# EAGLE board defcon2023_v1 (EAGLE 9.6.2)
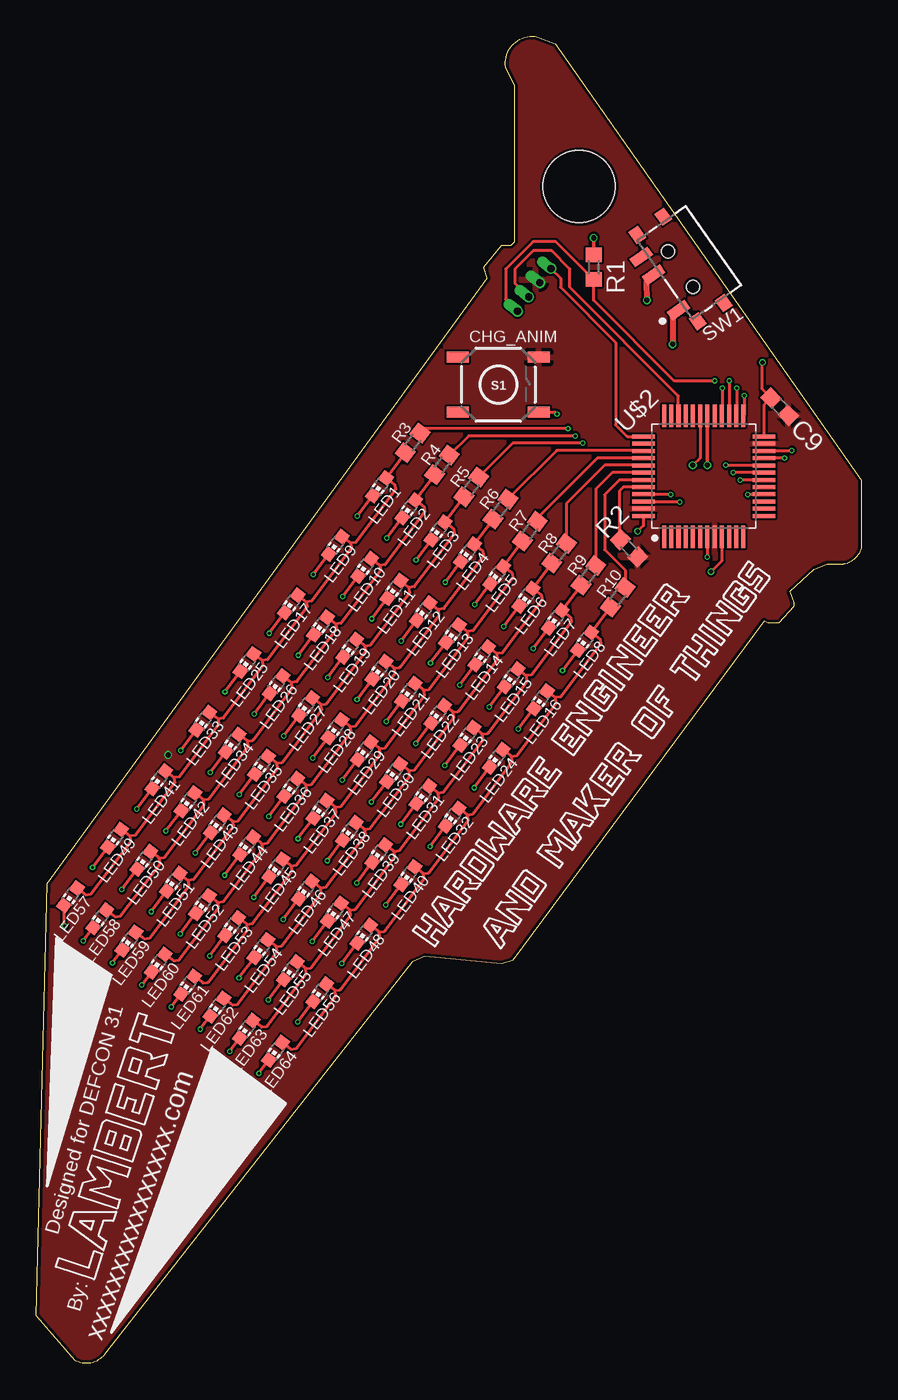
[diagram p0: board, top side]
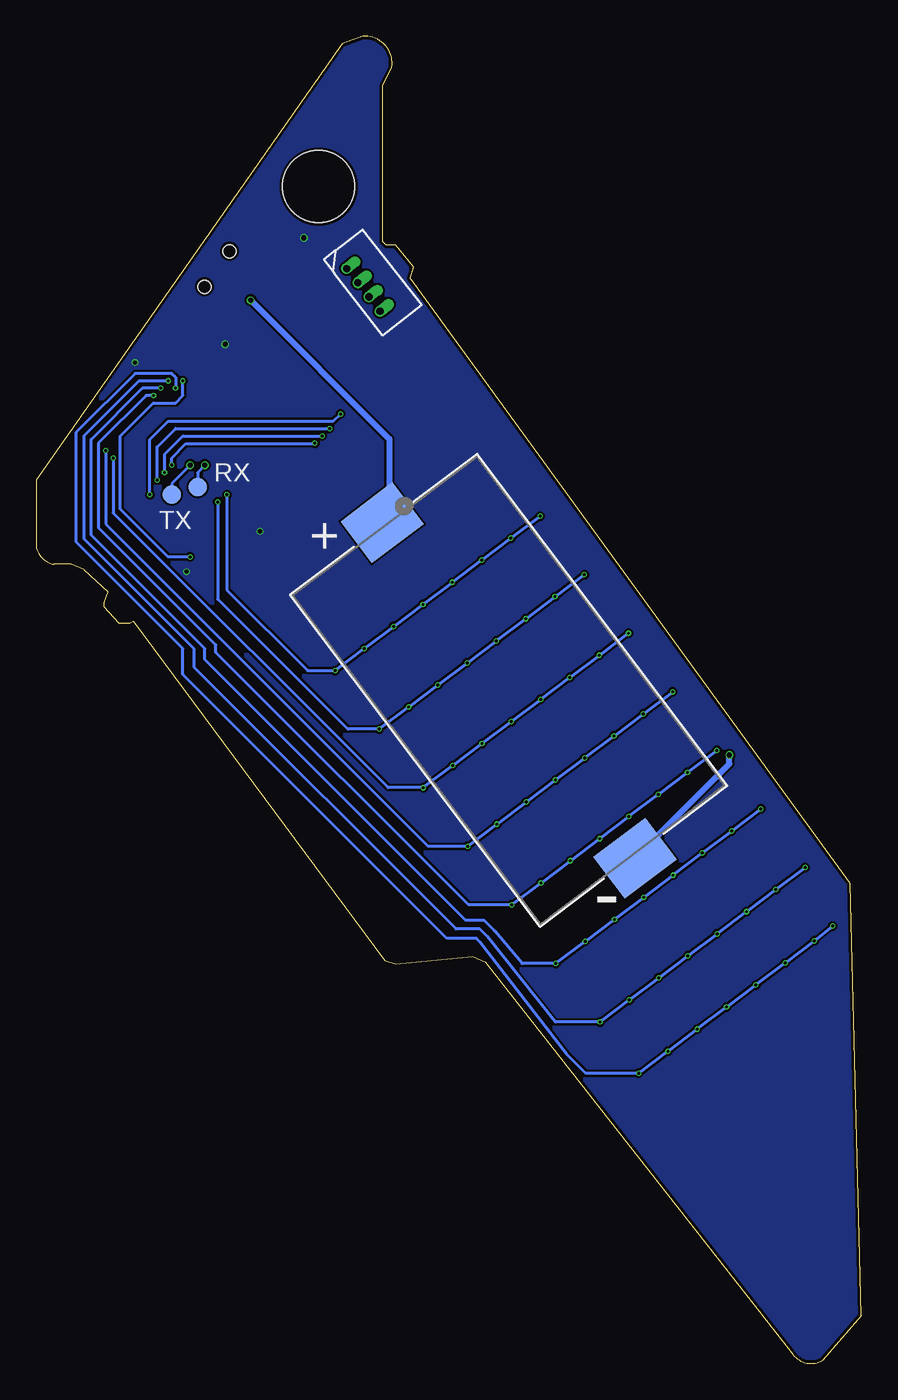
[diagram p1: board, bottom side, seen from below]

Size 57.15 x 91.94 mm. Coordinates in mm from the lower left corner, seen from the top.
Outline: 0,3.28 0.76,33.25 31.24,75.16 30.99,75.93 32.26,77.45 32.89,77.45 33.15,77.7 33.15,88.5 32.51,89.77 arc-104 34.54,91.93 35.94,91.42 57.15,61.19 57.15,56.62 arc-75 55.88,55.35 54.74,55.35 53.85,54.97 52.2,53.45 52.45,52.69 52.45,52.43 51.44,51.29 50.67,51.29 50.42,51.42 33.02,27.92 32.26,27.67 26.92,28.17 26.03,27.79 4.83,0.74 arc-90 2.67,0.23 0,3.28
Copper layers (1*16): Top 0.035mm / dielectric 0.2mm / Bottom 0.035mm
Design rules "JLC_2Layer_(workInProgress)": minimum track width 3.5mil, minimum drill 0.2mm, track to track 3.5mil, track to pad 5mil, pad to pad 5mil, via to via 5mil, smd to smd 0mil, copper to edge 0.2mm, drill to drill 0.2mm, minimum pad ring 3mil, minimum via ring 3mil, stop-mask expansion 0mil, vias tented up to drill 100mil, thermal gap 10mil
Holes 5 mm at 37.59,81.51

## Footprints (pad centres in the part's own frame; a part is rotated, then mirrored left to right if it is on the bottom)
BH-49A-5_ADM = smd 3.607 x 4.496: 1 -14.55,0; 2 14.55,0
C0603 = smd 1.1 x 1: 1 -0.85,0; 2 0.85,0
CHIP-LED0603 = smd 0.8 x 0.8: A 0,-0.75; C 0,0.75
4-PIN-1.25MM = drill 0.5 offset: P$1 -1.875,0.82; P$2 -0.625,0.82; P$3 0.625,0.82; P$4 1.875,0.82
R0603 = smd 1 x 1.1: 1 -0.85,0; 2 0.85,0
B1,27 = smd 1.27 x 1.27: TP 0,0
TACTILE_SWITCH_SMD_5.2MM = smd 1.524 x 0.762: 1 -2.794,1.905; 2 2.794,1.905; 3 -2.794,-1.905; 4 2.794,-1.905
ALPS_SSSS811101_0 = smd 0.7 x 1.5: 1 -2.25,2.5; 2 0.75,2.5; 3 2.25,2.5 | smd 1 x 0.8: 4 -3.65,1.85; 4-2 3.65,1.85; 4-3 -3.65,-0.35; 4-4 3.65,-0.35 | hole 0.9: -1.5,0.75; 1.5,0.75
QFP50P900X900X160-48 = smd 1.559 x 0.28: 1 -4.178,2.75; 2 -4.178,2.25; 3 -4.178,1.75; 4 -4.178,1.25; 5 -4.178,0.75; 6 -4.178,0.25; 7 -4.178,-0.25; 8 -4.178,-0.75; 9 -4.178,-1.25; 10 -4.178,-1.75; 11 -4.178,-2.25; 12 -4.178,-2.75; 25 4.178,-2.75; 26 4.178,-2.25; 27 4.178,-1.75; 28 4.178,-1.25; 29 4.178,-0.75; 30 4.178,-0.25; 31 4.178,0.25; 32 4.178,0.75; 33 4.178,1.25; 34 4.178,1.75; 35 4.178,2.25; 36 4.178,2.75 | smd 0.28 x 1.559: 13 -2.75,-4.178; 14 -2.25,-4.178; 15 -1.75,-4.178; 16 -1.25,-4.178; 17 -0.75,-4.178; 18 -0.25,-4.178; 19 0.25,-4.178; 20 0.75,-4.178; 21 1.25,-4.178; 22 1.75,-4.178; 23 2.25,-4.178; 24 2.75,-4.178; 37 2.75,4.178; 38 2.25,4.178; 39 1.75,4.178; 40 1.25,4.178; 41 0.75,4.178; 42 0.25,4.178; 43 -0.25,4.178; 44 -0.75,4.178; 45 -1.25,4.178; 46 -1.75,4.178; 47 -2.25,4.178; 48 -2.75,4.178

## Placement (x,y rotation side)
B1  BH-49A-5BH-49A-5_ADM  [BH-49A-5_ADM]  24.43,46.62 307 bottom
C9  0.1uF  [C0603]  51.49,66.27 315 top
LED1  [CHIP-LED0603]  23.78,60.72 143 top
LED2  [CHIP-LED0603]  25.81,59.19 143 top
LED3  [CHIP-LED0603]  27.83,57.66 143 top
LED4  [CHIP-LED0603]  29.86,56.13 143 top
LED5  [CHIP-LED0603]  31.89,54.6 143 top
LED6  [CHIP-LED0603]  33.92,53.07 143 top
LED7  [CHIP-LED0603]  35.95,51.55 143 top
LED8  [CHIP-LED0603]  37.98,50.02 143 top
LED9  [CHIP-LED0603]  20.72,56.66 143 top
LED10  [CHIP-LED0603]  22.75,55.13 143 top
LED11  [CHIP-LED0603]  24.78,53.6 143 top
LED12  [CHIP-LED0603]  26.81,52.08 143 top
LED13  [CHIP-LED0603]  28.83,50.55 143 top
LED14  [CHIP-LED0603]  30.86,49.02 143 top
LED15  [CHIP-LED0603]  32.89,47.49 143 top
LED16  [CHIP-LED0603]  34.92,45.96 143 top
LED17  [CHIP-LED0603]  17.66,52.6 143 top
LED18  [CHIP-LED0603]  19.69,51.08 143 top
LED19  [CHIP-LED0603]  21.72,49.55 143 top
LED20  [CHIP-LED0603]  23.75,48.02 143 top
LED21  [CHIP-LED0603]  25.78,46.49 143 top
LED22  [CHIP-LED0603]  27.81,44.96 143 top
LED23  [CHIP-LED0603]  29.83,43.43 143 top
LED24  [CHIP-LED0603]  31.86,41.9 143 top
LED25  [CHIP-LED0603]  14.61,48.55 143 top
LED26  [CHIP-LED0603]  16.63,47.02 143 top
LED27  [CHIP-LED0603]  18.66,45.49 143 top
LED28  [CHIP-LED0603]  20.69,43.96 143 top
LED29  [CHIP-LED0603]  22.72,42.43 143 top
LED30  [CHIP-LED0603]  24.75,40.9 143 top
LED31  [CHIP-LED0603]  26.78,39.38 143 top
LED32  [CHIP-LED0603]  28.8,37.85 143 top
LED33  [CHIP-LED0603]  11.55,44.49 143 top
LED34  [CHIP-LED0603]  13.58,42.96 143 top
LED35  [CHIP-LED0603]  15.61,41.43 143 top
LED36  [CHIP-LED0603]  17.63,39.9 143 top
LED37  [CHIP-LED0603]  19.66,38.38 143 top
LED38  [CHIP-LED0603]  21.69,36.85 143 top
LED39  [CHIP-LED0603]  23.72,35.32 143 top
LED40  [CHIP-LED0603]  25.75,33.79 143 top
LED41  [CHIP-LED0603]  8.49,40.43 143 top
LED42  [CHIP-LED0603]  10.52,38.9 143 top
LED43  [CHIP-LED0603]  12.55,37.38 143 top
LED44  [CHIP-LED0603]  14.58,35.85 143 top
LED45  [CHIP-LED0603]  16.6,34.32 143 top
LED46  [CHIP-LED0603]  18.63,32.79 143 top
LED47  [CHIP-LED0603]  20.66,31.26 143 top
LED48  [CHIP-LED0603]  22.69,29.73 143 top
LED49  [CHIP-LED0603]  5.43,36.38 143 top
LED50  [CHIP-LED0603]  7.46,34.85 143 top
LED51  [CHIP-LED0603]  9.49,33.32 143 top
LED52  [CHIP-LED0603]  11.52,31.79 143 top
LED53  [CHIP-LED0603]  13.55,30.26 143 top
LED54  [CHIP-LED0603]  15.58,28.73 143 top
LED55  [CHIP-LED0603]  17.6,27.2 143 top
LED56  [CHIP-LED0603]  19.63,25.68 143 top
LED57  [CHIP-LED0603]  2.38,32.32 143 top
LED58  [CHIP-LED0603]  4.4,30.79 143 top
LED59  [CHIP-LED0603]  6.43,29.26 143 top
LED60  [CHIP-LED0603]  8.46,27.73 143 top
LED61  [CHIP-LED0603]  10.49,26.2 143 top
LED62  [CHIP-LED0603]  12.52,24.68 143 top
LED63  [CHIP-LED0603]  14.55,23.15 143 top
LED64  [CHIP-LED0603]  16.58,21.62 143 top
PROG  4-PIN-1.25MM  [4-PIN-1.25MM]  33.84,74.86 128 bottom
R1  10k  [R0603]  38.61,75.93 90 top
R2  10k  [R0603]  41.06,56.46 315 top
R3  110r  [R0603]  26.07,63.76 53 top
R4  110r  [R0603]  28.1,62.23 53 top
R5  110r  [R0603]  30.13,60.7 53 top
R6  110r  [R0603]  32.16,59.17 53 top
R7  110r  [R0603]  34.18,57.65 53 top
R8  110r  [R0603]  36.21,56.12 53 top
R9  110r  [R0603]  38.24,54.59 53 top
R10  110r  [R0603]  40.27,53.06 53 top
RX  PTR1B1,27  [B1,27]  45.97,60.69 0 bottom
S1  [TACTILE_SWITCH_SMD_5.2MM]  32,67.8 0 top
SW1  ALPS_SSSS811101ALPS_SSSS811101_0_0  [ALPS_SSSS811101_0]  45.24,76.24 125 top
TX  PTR1B1,27  [B1,27]  47.75,60.18 0 bottom
U$2  STM32L431CC  [QFP50P900X900X160-48]  46.23,61.45 90 top

## Library data of the parts
B1 = 2057-BH-49A-5-ND; COPYRIGHT: Copyright (C) 2023 Ultra Librarian. All rights reserved.; DIGI-KEY_PART_NUMBER_1: 2057-BH-49A-5-ND; MANUFACTURER_PART_NUMBER: BH-49A-5; MFR_NAME: ADAM TECHNOLOGIES INC
C9 = rcl; SPICEPREFIX: C
LED1-LED64 = adafruit
PROG = Wingling Library
R1-R10 = rcl; SPICEPREFIX: R
RX TX = testpad
S1 = SparkFun-Switches; PROD_ID: SWCH-08247; SF_SKU: COM-08720
SW1 = ALPS - SSSS811101; CENTROID_NOT_SPECIFIED: No; CONTACT_RESISTANCE: 70mΩ; DATASHEET: http://www.alps.com/prod/info/E/HTML/Switch/Slide/SSSS8/SSSS811101.html; LEAD_FREE: yes; MF: ALPS; MOUSER_PART_NUMBER: 688-SSSS811101; MPN: SSSS811101; PACKAGE: SMD_SW_SPDT; PREFIX: SW; RATING_(MAX.)/(MIN.)_(RESISTIVE_LOAD): 0.3A 5V DC/50µA 3V DC; ROHS: yes; TEMPERATURE_RANGE_HIGH: +85°C; TEMPERATURE_RANGE_LOW: -40°C
U$2 = prankbox

## Nets
+3V3: C9.1 R1.2 SW1.1 U$2.9 U$2.24 U$2.48
GND: B1.2 C9.2 PROG.P$3 R2.2 S1.2 U$2.8 U$2.23 U$2.47
LED_N0: LED1.C LED2.C LED3.C LED4.C LED5.C LED6.C LED7.C LED8.C U$2.45
LED_N1: LED9.C LED10.C LED11.C LED12.C LED13.C LED14.C LED15.C LED16.C U$2.46
LED_N2: LED17.C LED18.C LED19.C LED20.C LED21.C LED22.C LED23.C LED24.C U$2.21
LED_N3: LED25.C LED26.C LED27.C LED28.C LED29.C LED30.C LED31.C LED32.C U$2.22
LED_N4: LED33.C LED34.C LED35.C LED36.C LED37.C LED38.C LED39.C LED40.C U$2.25
LED_N5: LED41.C LED42.C LED43.C LED44.C LED45.C LED46.C LED47.C LED48.C U$2.26
LED_N6: LED49.C LED50.C LED51.C LED52.C LED53.C LED54.C LED55.C LED56.C U$2.27
LED_N7: LED57.C LED58.C LED59.C LED60.C LED61.C LED62.C LED63.C LED64.C U$2.28
LED_P0: R3.2 U$2.18
LED_P0B: LED1.A LED9.A LED17.A LED25.A LED33.A LED41.A LED49.A LED57.A R3.1
LED_P1: R4.2 U$2.19
LED_P1B: LED2.A LED10.A LED18.A LED26.A LED34.A LED42.A LED50.A LED58.A R4.1
LED_P2: R5.2 U$2.20
LED_P2B: LED3.A LED11.A LED19.A LED27.A LED35.A LED43.A LED51.A LED59.A R5.1
LED_P3: R6.2 U$2.39
LED_P3B: LED4.A LED12.A LED20.A LED28.A LED36.A LED44.A LED52.A LED60.A R6.1
LED_P4: R7.2 U$2.40
LED_P4B: LED5.A LED13.A LED21.A LED29.A LED37.A LED45.A LED53.A LED61.A R7.1
LED_P5: R8.2 U$2.41
LED_P5B: LED6.A LED14.A LED22.A LED30.A LED38.A LED46.A LED54.A LED62.A R8.1
LED_P6: R9.2 U$2.42
LED_P6B: LED7.A LED15.A LED23.A LED31.A LED39.A LED47.A LED55.A LED63.A R9.1
LED_P7: R10.2 U$2.43
LED_P7B: LED8.A LED16.A LED24.A LED32.A LED40.A LED48.A LED56.A LED64.A R10.1
N$6: R2.1 U$2.44
N$14: B1.1 SW1.2
NRST: PROG.P$1 R1.1 U$2.7
SWCLK: PROG.P$4 U$2.37
SWDIO: PROG.P$2 U$2.34
TSC_A: S1.4 U$2.16
UART_RX: RX.TP U$2.31
UART_TX: TX.TP U$2.30

## Tracks (layer width: path | path; a pad name or v marks a point on that pad's centre or on a via)
+3V3  (via drill 0.3, 0.35)
  Top 0.203: U$2.24 50.41,66.4 C9.1 50.29,67.47 v50.29,69.32 | U$2.9 47.48,55.59 v46.74,54.84 | U$2.48 42.05,58.03 v41.66,57.64
  Top 0.254: R1.2 v38.61,77.96
  Top 0.406: SW1.1 44.07,72.52 v44.07,70.59
  pour Bottom (isolate 0.152): -3.05,-2.31 65.53,-2.31 65.53,94.98 -3.05,94.98
GND  (via drill 0.35)
  Bottom 0.406: B1.2 9.14,41.53 v9.14,42.14
  pour Top (isolate 0.152): -0.51,93.2 68.07,93.2 68.07,-4.85 -0.51,-4.85
LED_N0  (via drill 0.2)
  Top 0.203: LED1.C v22.25,58.69 | LED2.C v24.28,57.16 | LED3.C v26.3,55.63 | LED4.C v28.33,54.1 | LED5.C v30.36,52.57 | LED6.C v32.39,51.05 | LED7.C v34.42,49.52 | LED8.C v36.45,47.99 | v43.94,60.18 43.92,60.2 U$2.45
  Bottom 0.203: v22.25,58.69 v24.28,57.16 v26.3,55.63 v28.33,54.1 v30.36,52.57 v32.39,51.05 v34.42,49.52 v36.45,47.99 38.36,47.99 43.94,53.57 v43.94,60.18
LED_N1  (via drill 0.2)
  Top 0.203: LED9.C v19.19,54.63 | LED10.C v21.22,53.1 | LED11.C v23.25,51.57 | LED12.C v25.28,50.05 | LED13.C v27.3,48.52 | LED14.C v29.33,46.99 | LED15.C v31.36,45.46 | LED16.C v33.39,43.93 | v44.58,59.67 42.08,59.67 U$2.46
  Bottom 0.203: v19.19,54.63 v21.22,53.1 v23.25,51.57 v25.28,50.05 v27.3,48.52 v29.33,46.99 v31.36,45.46 v33.39,43.93 35.57,43.93 44.58,52.94 v44.58,59.67
LED_N2  (via drill 0.2)
  Top 0.203: LED17.C v16.13,50.57 | LED18.C v18.16,49.05 | LED19.C v20.19,47.52 | LED20.C v22.22,45.99 | LED21.C v24.25,44.46 | LED22.C v26.28,42.93 | LED23.C v28.3,41.4 | LED24.C v30.33,39.87 | v51.82,62.72 51.8,62.7 U$2.21
  Bottom 0.203: v16.13,50.57 v18.16,49.05 v20.19,47.52 v22.22,45.99 v24.25,44.46 v26.28,42.93 v28.3,41.4 v30.33,39.87 32.78,39.87 51.82,58.91 v51.82,62.72
LED_N3  (via drill 0.2)
  Top 0.203: LED25.C v13.08,46.52 | LED26.C v15.1,44.99 | LED27.C v17.13,43.46 | LED28.C v19.16,41.93 | LED29.C v21.19,40.4 | LED31.C v25.25,37.35 | LED32.C v27.28,35.82 | LED30.C v23.22,38.87 | v52.32,63.23 52.32,63.2 U$2.22
  Bottom 0.203: v13.08,46.52 v15.1,44.99 v17.13,43.46 v19.16,41.93 v21.19,40.4 v23.22,38.87 v25.25,37.35 v27.28,35.82 29.99,35.82 52.32,58.15 v52.32,63.23
LED_N4  (via drill 0.2)
  Top 0.203: LED33.C v10.02,42.46 | LED34.C v12.05,40.93 | LED35.C v14.08,39.4 | LED36.C v16.1,37.88 | LED37.C v18.13,36.35 | LED38.C v20.16,34.82 | LED39.C v22.19,33.29 | LED40.C v24.22,31.76 | v49.02,67.04 49.02,65.67 U$2.25
  Bottom 0.203: v10.02,42.46 v12.05,40.93 v14.08,39.4 v16.1,37.88 v18.13,36.35 v20.16,34.82 v22.19,33.29 v24.22,31.76 27.21,31.76 44.7,49.26 44.7,49.76 52.83,57.89 52.83,63.73 49.53,67.04 v49.02,67.04
LED_N5  (via drill 0.2)
  Top 0.203: LED41.C v6.96,38.4 | LED42.C v8.99,36.88 | LED43.C v11.02,35.35 | LED44.C v13.05,33.82 | LED45.C v15.08,32.29 | LED46.C v17.1,30.76 | LED47.C v19.13,29.23 | LED48.C v21.16,27.7 | v48.51,67.54 48.51,65.66 U$2.26
  Bottom 0.203: v6.96,38.4 v8.99,36.88 v11.02,35.35 v13.05,33.82 v15.08,32.29 v17.1,30.76 v19.13,29.23 v21.16,27.7 23.5,27.7 25.4,29.95 26.16,30.71 27.43,30.71 45.47,48.75 45.47,49.51 53.34,57.38 53.34,63.99 49.78,67.54 v48.51,67.54
LED_N6  (via drill 0.2)
  Top 0.203: LED49.C v3.91,34.35 | LED50.C v5.93,32.82 | LED51.C v7.96,31.29 | LED52.C v9.99,29.76 | LED53.C v12.02,28.23 | LED54.C v14.05,26.7 | LED55.C v16.08,25.18 | LED56.C v18.1,23.65 | v48.01,68.05 48.01,65.65 U$2.27
  Bottom 0.203: v3.91,34.35 v5.93,32.82 v7.96,31.29 v9.99,29.76 v12.02,28.23 v14.05,26.7 v16.08,25.18 v18.1,23.65 21.19,23.65 25.91,29.57 26.42,30.08 28.07,30.08 46.23,48.24 46.23,49.51 53.85,57.13 53.85,64.24 50.04,68.05 v48.01,68.05
LED_N7  (via drill 0.2)
  Top 0.203: U$2.28 47.5,65.65 v47.5,67.54 | LED57.C 1.92,30.34 v1.99,30.29 | LED58.C v3.26,29.27 | LED59.C v5.29,27.74 | v7.31,26.21 LED60.C | LED61.C v9.34,24.68 | LED62.C v11.37,23.15 | LED63.C v13.4,21.63 | LED64.C v15.43,20.1
  Bottom 0.203: v47.5,67.54 47.5,68.31 47.75,68.56 50.29,68.56 54.36,64.5 54.36,56.88 46.99,49.51 46.99,47.73 28.7,29.44 26.67,29.44 26.42,29.19 20.41,21.41 19.1,20.1 v15.43,20.1 v13.4,21.63 v11.37,23.15 v9.34,24.68 v7.31,26.21 v5.29,27.74 v3.26,29.27 v1.99,30.29
LED_P0  (via drill 0.2)
  Top 0.203: U$2.18 v48.77,61.19 | v36.83,64.75 26.89,64.75 R3.2
  Bottom 0.203: v48.77,61.19 48.77,63.48 47.5,64.75 v36.83,64.75
LED_P0B
  Top 0.203: LED9.A 21.77,56.81 | 21.77,56.81 22.14,56.86 24.89,60.51 24.85,60.85 LED1.A R3.1 | 21.77,56.81 21.82,56.44 19.08,52.8 18.71,52.75 | LED17.A 18.71,52.75 | 18.71,52.75 18.77,52.38 16.03,48.75 15.66,48.69 | LED25.A 15.66,48.69 | 15.66,48.69 15.71,48.32 12.97,44.69 12.6,44.64 | LED33.A 12.6,44.64 | 12.6,44.64 12.65,44.26 9.91,40.63 9.54,40.58 | LED41.A 9.54,40.58 | 9.54,40.58 9.59,40.21 6.86,36.58 6.48,36.52 | LED49.A 6.48,36.52 | 6.48,36.52 6.54,36.15 3.8,32.52 3.43,32.47 LED57.A
LED_P1  (via drill 0.2)
  Top 0.203: U$2.19 v48.26,61.7 | v37.34,64.24 29.94,64.24 R4.2
  Bottom 0.203: v48.26,61.7 48.26,62.97 46.99,64.24 v37.34,64.24
LED_P1B
  Top 0.203: LED10.A 23.8,55.28 | 23.8,55.28 24.17,55.33 26.92,58.98 26.88,59.32 LED2.A R4.1 | 23.8,55.28 23.85,54.91 21.11,51.27 20.74,51.22 | LED18.A 20.74,51.22 | 20.74,51.22 20.76,51.21 20.81,50.87 18.06,47.22 17.68,47.17 | 17.68,47.17 LED26.A | LED34.A 14.05,43.56 14.64,43.11 | 14.64,43.11 15,43.16 17.74,46.79 17.68,47.17 | LED42.A 10.99,39.51 11.59,39.05 | 11.59,39.05 11.94,39.1 14.69,42.76 14.64,43.11 | LED50.A 7.93,35.45 8.53,35 | 8.53,35 8.88,35.05 11.64,38.7 11.59,39.05 | LED58.A 4.87,31.39 5.47,30.94 5.83,30.99 8.58,34.64 8.53,35
LED_P2  (via drill 0.2)
  Top 0.203: U$2.20 47.75,62.2 v47.75,62.21 | v37.85,63.73 32.99,63.73 R5.2
  Bottom 0.203: v47.75,62.21 47.75,62.72 46.77,63.7 41.91,63.7 | 41.91,63.7 37.88,63.7 v37.85,63.73 | 41.91,63.7
LED_P2B
  Top 0.203: 25.83,53.75 LED11.A | 25.83,53.75 26.2,53.8 28.95,57.45 28.9,57.79 LED3.A R5.1 | LED19.A 22.19,50.15 22.79,49.7 | 22.79,49.7 23.14,49.75 25.88,53.38 25.83,53.75 | LED27.A 19.13,46.09 19.73,45.64 | 19.73,45.64 20.08,45.69 22.84,49.34 22.79,49.7 | LED35.A 16.07,42.03 16.67,41.58 | 16.67,41.58 17.03,41.63 19.78,45.28 19.73,45.64 | 16.67,41.58 16.72,41.23 13.97,37.58 13.61,37.53 | LED51.A 10.55,33.47 | LED43.A 13.02,37.98 13.61,37.53 | 13.61,37.53 13.66,37.17 10.91,33.52 10.55,33.47 | LED59.A 6.9,29.86 7.5,29.41 7.86,29.46 10.6,33.1 10.55,33.47
LED_P3
  Top 0.203: U$2.39 42.02,63.23 36.04,63.23 R6.2
LED_P3B
  Top 0.203: 27.86,52.22 LED12.A | 27.86,52.22 28.23,52.27 30.98,55.93 30.93,56.26 LED4.A R6.1 | LED20.A 24.22,48.62 24.81,48.17 | 24.81,48.17 25.17,48.22 27.91,51.85 27.86,52.22 | LED28.A 21.16,44.56 21.76,44.11 | 21.76,44.11 22.11,44.16 24.86,47.81 24.81,48.17 | LED36.A 18.1,40.5 18.7,40.05 | 18.7,40.05 19.06,40.1 21.81,43.75 21.76,44.11 | LED44.A 15.05,36.45 15.64,36 | 15.64,36 16,36.05 18.75,39.7 18.7,40.05 | LED52.A 11.99,32.39 12.59,31.94 | 12.59,31.94 12.94,31.99 15.69,35.64 15.64,36 | LED60.A 8.93,28.33 9.53,27.88 9.88,27.93 12.64,31.58 12.59,31.94
LED_P4
  Top 0.203: U$2.40 42.03,62.72 38.86,62.72 34.69,58.55 R7.2
LED_P4B
  Top 0.203: 29.88,50.69 LED13.A | 29.88,50.69 30.26,50.75 33.01,54.4 32.96,54.74 LED5.A R7.1 | LED21.A 26.24,47.09 26.84,46.64 | 26.84,46.64 27.2,46.69 29.94,50.32 29.88,50.69 | LED29.A 23.19,43.03 23.79,42.58 | 23.79,42.58 24.14,42.63 26.89,46.28 26.84,46.64 | LED37.A 20.13,38.98 20.73,38.52 | 20.73,38.52 21.08,38.57 23.84,42.23 23.79,42.58 | LED45.A 17.07,34.92 17.67,34.47 | 17.67,34.47 18.03,34.52 20.78,38.17 20.73,38.52 | LED53.A 14.02,30.86 14.61,30.41 | 14.61,30.41 14.97,30.46 17.72,34.11 17.67,34.47 | 14.61,30.41 14.66,30.06 11.91,26.4 11.56,26.35 10.96,26.81 LED61.A
LED_P5
  Top 0.203: U$2.41 42.04,62.21 39.37,62.21 36.72,59.56 R8.2
LED_P5B
  Top 0.203: 31.91,49.17 LED14.A | 31.91,49.17 32.28,49.22 35.04,52.87 34.99,53.21 LED6.A R8.1 | LED22.A 28.27,45.56 28.87,45.11 | 28.87,45.11 29.23,45.16 31.97,48.79 31.91,49.17 | LED30.A 25.22,41.5 25.81,41.05 | 25.81,41.05 26.17,41.1 28.92,44.75 28.87,45.11 | LED38.A 22.16,37.45 22.76,37 | 22.76,37 23.11,37.05 25.86,40.7 25.81,41.05 | LED46.A 19.1,33.39 19.7,32.94 | 19.7,32.94 20.06,32.99 22.81,36.64 22.76,37 | LED54.A 16.04,29.33 16.64,28.88 | 16.64,28.88 17,28.93 19.75,32.58 19.7,32.94 | LED62.A 12.99,25.28 13.59,24.83 13.94,24.88 16.69,28.53 16.64,28.88
LED_P6
  Top 0.203: U$2.42 39.88,61.7 38.75,60.58 R9.2
LED_P6B
  Top 0.203: 33.94,47.64 LED15.A | 33.94,47.64 34.31,47.69 37.06,51.34 37.02,51.68 LED7.A R9.1 | LED23.A 30.3,44.03 30.9,43.58 | 30.9,43.58 31.26,43.63 33.99,47.26 33.94,47.64 | LED31.A 27.24,39.98 27.84,39.52 | 27.84,39.52 28.2,39.57 30.95,43.23 30.9,43.58 | LED39.A 24.19,35.92 24.79,35.47 | 24.79,35.47 25.14,35.52 27.89,39.17 27.84,39.52 | LED47.A 21.13,31.86 21.73,31.41 | 21.73,31.41 22.08,31.46 24.84,35.11 24.79,35.47 | LED55.A 18.07,27.8 18.67,27.35 | 18.67,27.35 19.03,27.4 21.78,31.05 21.73,31.41 | LED63.A 15.02,23.75 15.61,23.3 15.97,23.35 18.72,27 18.67,27.35
LED_P7
  Top 0.203: U$2.43 40.39,61.2 40.39,61.19 39.37,60.18 39.37,56.37 40.78,54.96 R10.2
LED_P7B
  Top 0.203: 35.97,46.11 LED16.A | 35.97,46.11 36.34,46.16 39.09,49.81 39.05,50.15 LED8.A R10.1 | LED24.A 32.33,42.5 32.93,42.05 | 32.93,42.05 33.28,42.1 36.02,45.74 35.97,46.11 | LED32.A 29.27,38.45 29.87,38 | 29.87,38 30.23,38.05 32.98,41.7 32.93,42.05 | LED40.A 26.22,34.39 26.81,33.94 | 26.81,33.94 27.17,33.99 29.92,37.64 29.87,38 | LED48.A 23.16,30.33 23.76,29.88 | 23.76,29.88 24.11,29.93 26.86,33.58 26.81,33.94 | LED56.A 20.1,26.28 20.7,25.82 | 20.7,25.82 21.06,25.87 23.81,29.53 23.76,29.88 | LED64.A 17.04,22.22 17.64,21.77 18,21.82 20.75,25.47 20.7,25.82
N$6
  Top 0.203: R2.1 40.39,57.13 40.39,60.43 40.65,60.7 U$2.44
N$14  (via drill 0.35)
  Top 0.406: SW1.2 42.26,74.9 v42.29,73.64
  Bottom 0.406: B1.1 32.68,58.74 32.68,64.03 v42.29,73.64
NRST  (via drill 0.2)
  Top 0.203: U$2.7 v46.48,55.86 | v46.99,68.05 44.2,68.05 38.61,73.64 R1.1 35.98,77.7 34.42,77.7 32.51,75.8 32.51,73.7 PROG.P$1
  Bottom 0.203: v46.48,55.86 48.01,55.86 51.31,59.16 51.31,64.24 49.02,66.53 47.5,66.53 46.99,67.04 v46.99,68.05
SWCLK
  Top 0.203: U$2.37 40.94,64.2 40.13,65 40.13,70.72 36.32,74.53 36.32,75.16 PROG.P$4
SWDIO
  Top 0.203: U$2.34 44.48,67.01 36.96,74.53 36.96,75.8 35.69,77.07 34.42,77.07 33.15,75.8 33.15,74.82 PROG.P$2
TSC_A  (via drill 0.2)
  Top 0.203: U$2.16 50.39,60.18 v49.28,60.18 | S1.4 35.94,65.89 v36.07,65.77
  Bottom 0.203: v49.28,60.18 49.28,63.99 48.01,65.26 36.58,65.26 v36.07,65.77
UART_RX  (via drill 0.35)
  Top 0.203: U$2.31 45.98,62.72 v45.47,62.21
  Bottom 0.203: v45.47,62.21 45.97,61.7 RX.TP
UART_TX  (via drill 0.35)
  Top 0.254: U$2.30 v46.48,62.21
  Bottom 0.203: v46.48,62.21 47.75,60.94 TX.TP

## Text on the board
tPlace: Designed for DEFCON 31 | By: | xxxxxxxxxxxxxxxx.com
tNames: CHG_ANIM
bNames: + | -
tDocu: - +